# EAGLE board RedBoard_Plus-Panel (EAGLE 9.6.2), part 1 of 6
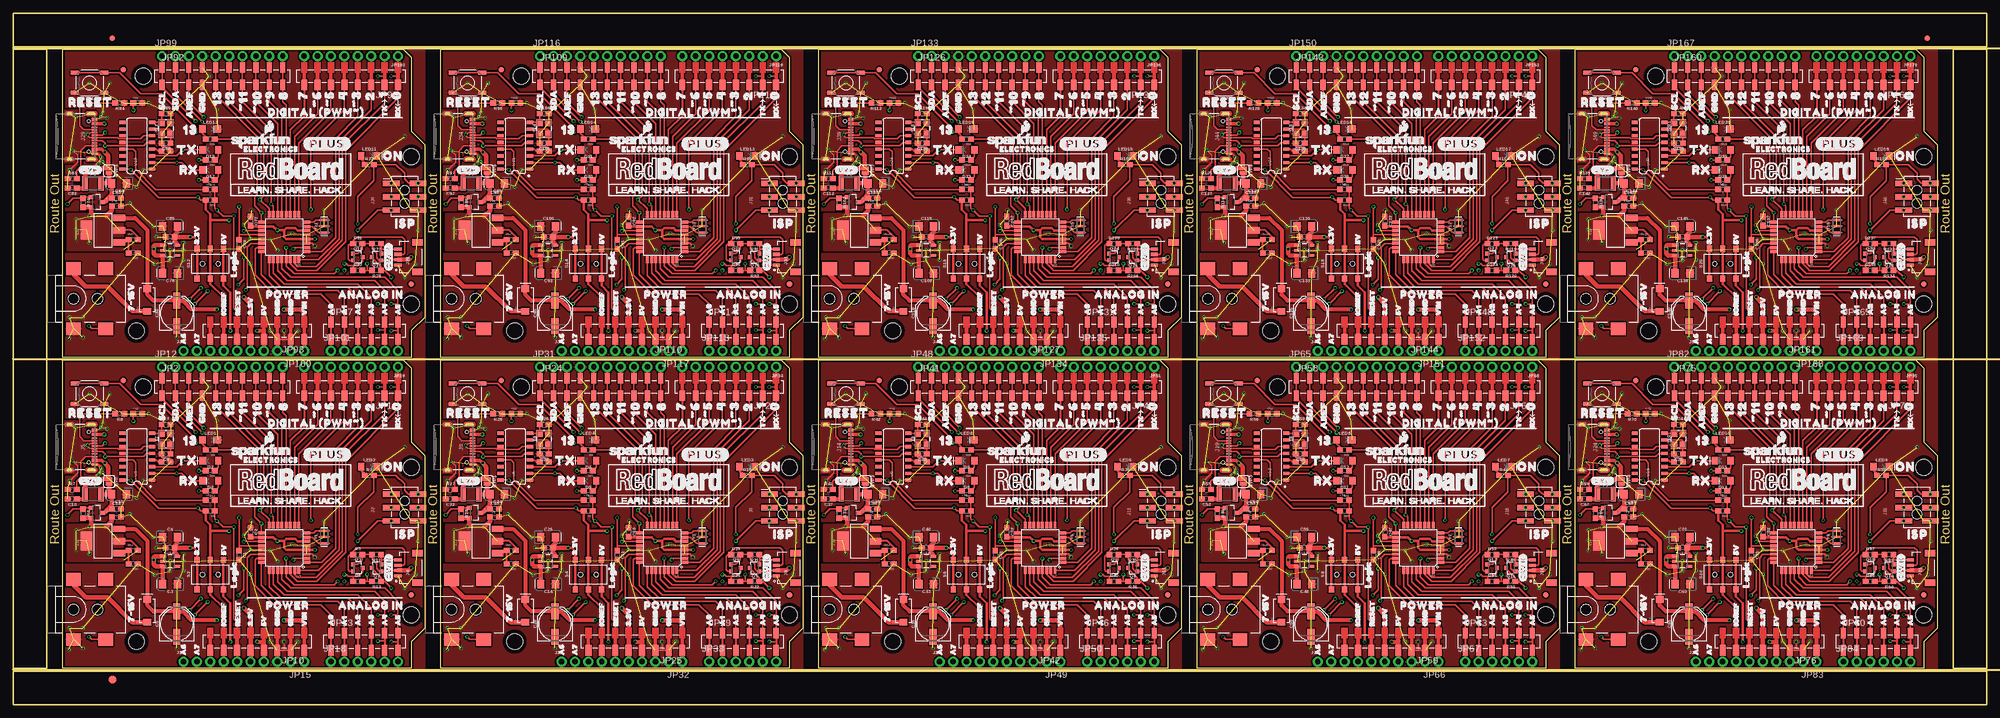
[diagram p0: board, top side]
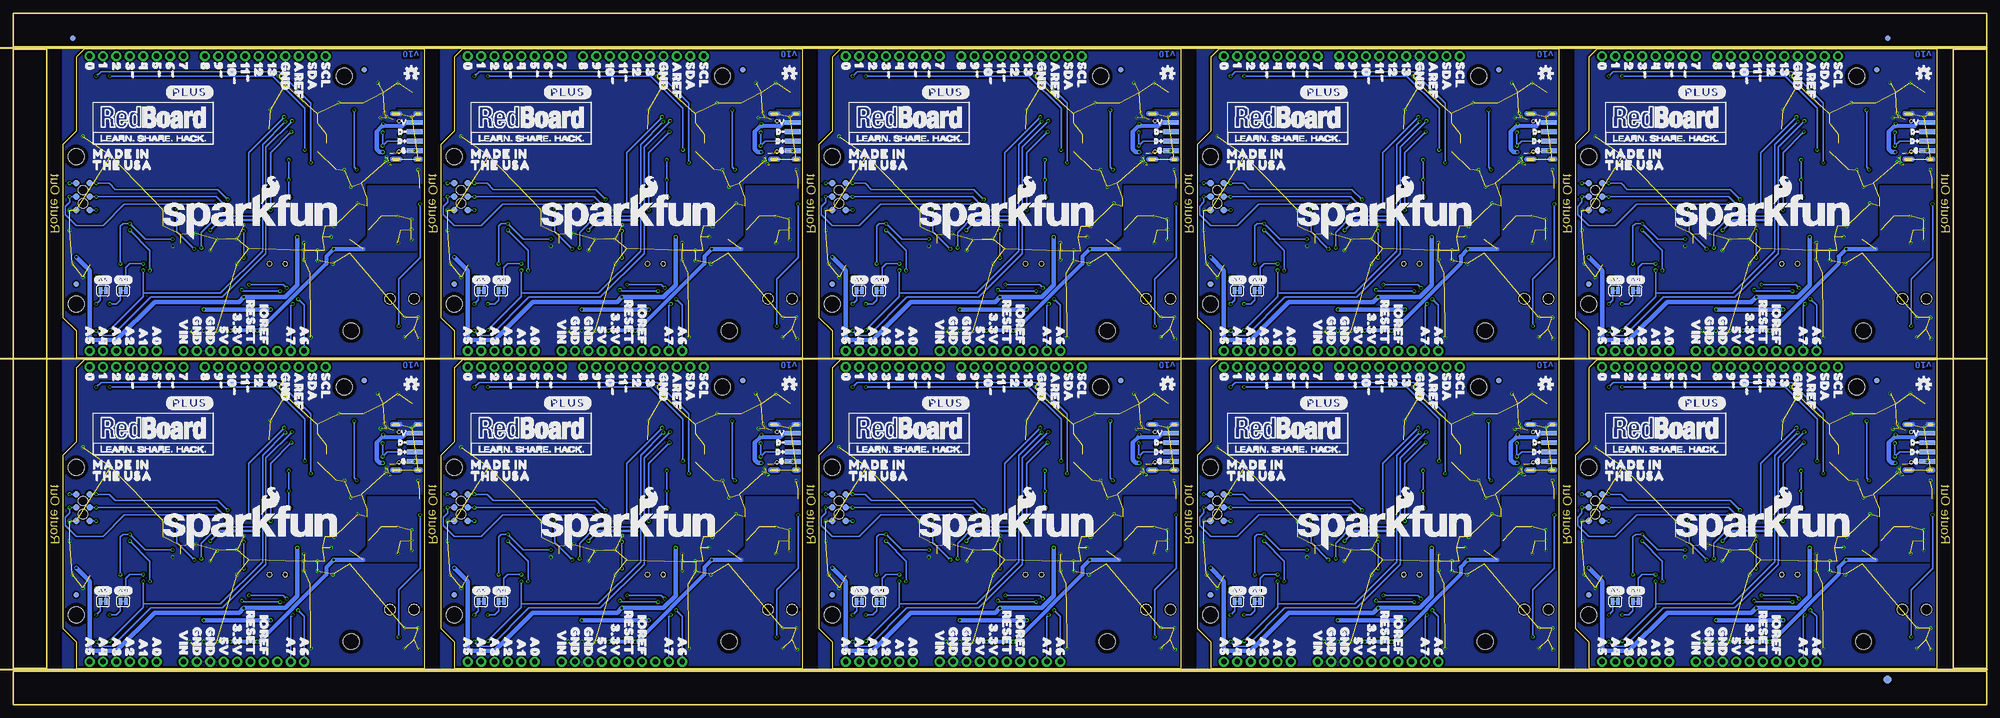
[diagram p1: board, bottom side, seen from below]

Size 373.89 x 131.06 mm. Coordinates in mm from the lower left corner, seen from the top.
Outline: 9.4,65.28 73.91,65.28 75.44,63.75 75.44,49.78 77.98,47.24 77.98,14.48 75.44,11.94 75.44,6.86 9.4,6.86 9.4,65.28
Outline: 81.03,65.28 145.54,65.28 147.07,63.75 147.07,49.78 149.61,47.24 149.61,14.48 147.07,11.94 147.07,6.86 81.03,6.86 81.03,65.28
Outline: 152.65,65.28 217.17,65.28 218.69,63.75 218.69,49.78 221.23,47.24 221.23,14.48 218.69,11.94 218.69,6.86 152.65,6.86 152.65,65.28
Outline: 224.28,65.28 288.8,65.28 290.32,63.75 290.32,49.78 292.86,47.24 292.86,14.48 290.32,11.94 290.32,6.86 224.28,6.86 224.28,65.28
Outline: 295.91,65.28 360.43,65.28 361.95,63.75 361.95,49.78 364.49,47.24 364.49,14.48 361.95,11.94 361.95,6.86 295.91,6.86 295.91,65.28
Outline: 9.4,124.21 73.91,124.21 75.44,122.68 75.44,108.71 77.98,106.17 77.98,73.41 75.44,70.87 75.44,65.79 9.4,65.79 9.4,124.21
Outline: 81.03,124.21 145.54,124.21 147.07,122.68 147.07,108.71 149.61,106.17 149.61,73.41 147.07,70.87 147.07,65.79 81.03,65.79 81.03,124.21
Outline: 152.65,124.21 217.17,124.21 218.69,122.68 218.69,108.71 221.23,106.17 221.23,73.41 218.69,70.87 218.69,65.79 152.65,65.79 152.65,124.21
Outline: 224.28,124.21 288.8,124.21 290.32,122.68 290.32,108.71 292.86,106.17 292.86,73.41 290.32,70.87 290.32,65.79 224.28,65.79 224.28,124.21
Outline: 295.91,124.21 360.43,124.21 361.95,122.68 361.95,108.71 364.49,106.17 364.49,73.41 361.95,70.87 361.95,65.79 295.91,65.79 295.91,124.21
Outline: 0,6.35 373.89,6.35 373.89,0 0,0 0,6.35
Outline: 367.54,124.21 373.89,124.21 373.89,6.86 367.54,6.86 367.54,124.21
Outline: 0,131.06 373.89,131.06 373.89,124.71 0,124.71 0,131.06
Outline: 0,124.21 6.35,124.21 6.35,6.86 0,6.86 0,124.21
Copper layers (1*16): Top 0.035mm / dielectric 1.5mm / Bottom 0.035mm
Design rules "RedBoard_Plus": minimum track width 5mil, minimum drill 0.3mm, track to track 5mil, track to pad 5mil, pad to pad 5mil, via to via 5mil, smd to smd 5mil, copper to edge 7mil, drill to drill 7mil, minimum pad ring 5mil, minimum via ring 5mil, stop-mask expansion 2.5mil, vias tented up to drill 25mil, thermal gap 10mil
Net classes: 0 default: width 0 mm, drill 0 mm; 1 power: width 0.762 mm
vRestrict: area 10,29.2 to 11.4,37.5; area 15.1,30 to 16.8,37.5; area 57.3,17.7 to 57.9,18.2; area 59.8,17.5 to 60.3,18.4; area 20.7,36.2 to 22.1,38.5; area 9.7,19.8 to 18.8,31.9; area 81.7,29.2 to 83.1,37.5; area 86.7,30 to 88.4,37.5; area 128.9,17.7 to 129.5,18.2; area 131.4,17.5 to 132,18.4; area 92.3,36.2 to 93.7,38.5; area 81.3,19.8 to 90.4,31.9; area 153.3,29.2 to 154.7,37.5; area 158.4,30 to 160,37.5; area 200.5,17.7 to 201.2,18.2; area 203.1,17.5 to 203.6,18.4; area 164,36.2 to 165.4,38.5; area 152.9,19.8 to 162.1,31.9; area 224.9,29.2 to 226.3,37.5; area 230,30 to 231.6,37.5; area 272.2,17.7 to 272.8,18.2; area 274.7,17.5 to 275.2,18.4; area 235.6,36.2 to 237,38.5; area 224.5,19.8 to 233.7,31.9; area 296.5,29.2 to 297.9,37.5; area 301.6,30 to 303.3,37.5; area 343.8,17.7 to 344.4,18.2; area 346.3,17.5 to 346.8,18.4; area 307.2,36.2 to 308.6,38.5; area 296.2,19.8 to 305.3,31.9; area 10,88.1 to 11.4,96.4; area 15.1,88.9 to 16.8,96.4; area 57.3,76.6 to 57.9,77.1; area 59.8,76.5 to 60.3,77.3; area 20.7,95.1 to 22.1,97.4; area 9.7,78.7 to 18.8,90.8; area 81.7,88.1 to 83.1,96.4; area 86.7,88.9 to 88.4,96.4; area 128.9,76.6 to 129.5,77.1; area 131.4,76.5 to 132,77.3; area 92.3,95.1 to 93.7,97.4; area 81.3,78.7 to 90.4,90.8; area 153.3,88.1 to 154.7,96.4; area 158.4,88.9 to 160,96.4; area 200.5,76.6 to 201.2,77.1; area 203.1,76.5 to 203.6,77.3; area 164,95.1 to 165.4,97.4; area 152.9,78.7 to 162.1,90.8; area 224.9,88.1 to 226.3,96.4; area 230,88.9 to 231.6,96.4; area 272.2,76.6 to 272.8,77.1; area 274.7,76.5 to 275.2,77.3; area 235.6,95.1 to 237,97.4; area 224.5,78.7 to 233.7,90.8; area 296.5,88.1 to 297.9,96.4; area 301.6,88.9 to 303.3,96.4; area 343.8,76.6 to 344.4,77.1; area 346.3,76.5 to 346.8,77.3; area 307.2,95.1 to 308.6,97.4; area 296.2,78.7 to 305.3,90.8
Milling: 3 lines

## Footprints (pad centres in the part's own frame; a part is rotated, then mirrored left to right if it is on the bottom)
SMT-JUMPER_2_NO_SILK = smd 0.635 x 1.27: 1 -0.406,0; 2 0.406,0
0603 = smd 1.1 x 1: 1 -0.85,0; 2 0.85,0
EIA3216 = smd 1.4 x 1.6: + 1.4,0; - -1.4,0
PANASONIC_D = smd 3 x 1.4: + 2.4,0; - -2.4,0
SMA-DIODE = smd 1.27 x 1.47: A -2.15,0; C 2.15,0
LED-1206 = smd 1.2 x 1.4: A -1.5,0; C 1.5,0
LED-1206-HIDDENSILK = smd 1.2 x 1.4: A -1.5,0; C 1.5,0
FIDUCIAL-1X2 = smd 1 x 1: 1 0,0
FIDUCIAL-1.5X3 = smd 1.5 x 1.5: 1 0,0
1210 = smd 1 x 2.8: 1 -1.5,0; 2 1.5,0
SOT223 = smd 1.219 x 2.235: 1 -2.311,-3.099; 2 0,-3.099; 3 2.311,-3.099 | smd 3.6 x 2.2: 4 0,3.099
1X02_NO_SILK = drill 1.016 pad 1.88: 1 0,0; 2 2.54,0
2X3_SMT_POSTS = smd 1 x 3.17: 1 -2.54,-2.54; 2 -2.54,2.54; 3 0,-2.54; 4 0,2.54; 5 2.54,-2.54; 6 2.54,2.54 | hole 1.8: -1.27,0; 1.27,0
POWER_JACK_SMD = smd 2.8 x 2.4: GND 0,-5.7; P$4 6.1,-5.7; VIN0 0,5.7; VIN1 6.1,5.7 | hole 2.032: 0,0; 4.572,0
JST04_1MM_RA = smd 0.6 x 1.35: 1 -1.5,0; 2 -0.5,0; 3 0.5,0; 4 1.5,0 | smd 1.2 x 2: NC1 2.8,-3.675; NC2 -2.8,-3.675
USB-C-16P-2LAYER-PADS = smd 0.3 x 1: A5 -1.25,-0.34; A6 -0.25,-0.34; A7 0.25,-0.34; A8 1.25,-0.34; B5 1.75,-0.34; B6 0.75,-0.34; B7 -0.75,-0.34; B8 -1.75,-0.34 | smd 0.6 x 1: GND -3.225,-0.34; GND2 3.225,-0.34; VBUS1 -2.45,-0.34; VBUS2 2.45,-0.34 | drill 0.4 pad 0.6 long: SHLD1 -4.318,-0.915; SHLD2 4.318,-0.915; SHLD3 -4.318,-5.095; SHLD4 4.318,-5.095 | hole 0.65: -2.89,-1.445; 2.89,-1.445
1X10_SMD_COMBINED = smd 1 x 2: 1A 0,1.65; 1B 0,-1.65; 2A 2.54,1.65; 2B 2.54,-1.65; 3A 5.08,1.65; 3B 5.08,-1.65; 4A 7.62,1.65; 4B 7.62,-1.65; 5A 10.16,1.65; 5B 10.16,-1.65; 6A 12.7,1.65; 6B 12.7,-1.65; 7A 15.24,1.65; 7B 15.24,-1.65; 8A 17.78,1.65; 8B 17.78,-1.65; 9A 20.32,1.65; 9B 20.32,-1.65; 10A 22.86,1.65; 10B 22.86,-1.65
STAND-OFF-TIGHT = hole 3.048: 0,0
1X08_SMD_COMBINED = smd 1 x 2: 1 0,1.65; 2 2.54,1.65; 3 5.08,1.65; 4 7.62,1.652; 5 10.16,1.65; 6 12.7,1.652; 7 15.24,1.65; 8 17.78,1.652
1X10_NO_SILK = drill 1.016 pad 1.88: 1 0,0; 2 2.54,0; 3 5.08,0; 4 7.62,0; 5 10.16,0; 6 12.7,0; 7 15.24,0; 8 17.78,0; 9 20.32,0; 10 22.86,0
1X06_SMD_STRAIGHT_COMBO = smd 1 x 2: 1 0,-1.65; 1-2 0,1.65; 2 2.54,1.65; 2-2 2.54,-1.65; 3 5.08,-1.65; 3-2 5.08,1.65; 4 7.62,1.65; 4-2 7.62,-1.65; 5 10.16,-1.65; 5-2 10.16,1.65; 6 12.7,1.65; 6-2 12.7,-1.65
USB-SOLDER-PADS = smd 3 x 0.9: D+ 0,-0.889; D- 0,0.889; GND 0,-2.667; VBUS 0,2.667
1X08_NO_SILK = drill 1.016 pad 1.88: 1 0,0; 2 2.54,0; 3 5.08,0; 4 7.62,0; 5 10.16,0; 6 12.7,0; 7 15.24,0; 8 17.78,0
1X06_NO_SILK = drill 1.016 pad 1.88: 1 0,0; 2 2.54,0; 3 5.08,0; 4 7.62,0; 5 10.16,0; 6 12.7,0
SOT23-3 = smd 0.8 x 0.9: 1 -0.95,-1; 2 0.95,-1; 3 0,1.1
SOT323 = smd 0.7 x 0.7: 1 -0.65,-0.925; 2 0.65,-0.925; 3 0,0.925
SMT-JUMPER_2_NC_TRACE_SILK = smd 0.66 x 1.27: 1 -0.521,0; 2 0.521,0
TACTILE_SWITCH_SMD_5.2MM = smd 1.524 x 0.762: 1 -2.794,1.905; 2 2.794,1.905; 3 -2.794,-1.905; 4 2.794,-1.905
SWITCH_DPDT_SMD_AYZ0202 = smd 1 x 1.15: 1 -2.5,2.825; 2 0,2.825; 3 2.5,2.825; 4 -2.5,-2.825; 5 0,-2.825; 6 2.5,-2.825 | hole 0.85: 1.5,0; -1.5,0
PAD.03X.05 = smd 1.27 x 1.27: P$1 0,0
SO016 = smd 0.6 x 1.2: 1 -4.445,-2.8; 2 -3.175,-2.8; 3 -1.905,-2.8; 4 -0.635,-2.8; 5 0.635,-2.8; 6 1.905,-2.8; 7 3.175,-2.8; 8 4.445,-2.8; 9 4.445,2.8; 10 3.175,2.8; 11 1.905,2.8; 12 0.635,2.8; 13 -0.635,2.8; 14 -1.905,2.8; 15 -3.175,2.8; 16 -4.445,2.8
TQFP32-08 = smd 1.27 x 0.559: 1 -4.293,2.8; 2 -4.293,2; 3 -4.293,1.2; 4 -4.293,0.4; 5 -4.293,-0.4; 6 -4.293,-1.2; 7 -4.293,-2; 8 -4.293,-2.8; 17 4.293,-2.8; 18 4.293,-2; 19 4.293,-1.2; 20 4.293,-0.4; 21 4.293,0.4; 22 4.293,1.2; 23 4.293,2; 24 4.293,2.8 | smd 0.559 x 1.27: 9 -2.8,-4.293; 10 -2,-4.293; 11 -1.2,-4.293; 12 -0.4,-4.293; 13 0.4,-4.293; 14 1.2,-4.293; 15 2,-4.293; 16 2.8,-4.293; 25 2.8,4.293; 26 2,4.293; 27 1.2,4.293; 28 0.4,4.293; 29 -0.4,4.293; 30 -1.2,4.293; 31 -2,4.293; 32 -2.8,4.293
SOT23-5 = smd 0.55 x 1.2: 1 -0.95,-1.3; 2 0,-1.3; 3 0.95,-1.3; 4 0.95,1.3; 5 -0.95,1.3
RESONATOR-SMD-3.2X1.3 = smd 0.45 x 1.905: 1 -1.2,0; 2 0,0; 3 1.2,0
CRYSTAL-SMD-3.2X2.5MM = smd 1.4 x 1.2: 1 -1.1,-0.85; 2 1.1,-0.85; 3 1.1,0.85; 4 -1.1,0.85

## Placement (x,y rotation side)
BYP  JUMPER-SMT_2_NO_SILK  [SMT-JUMPER_2_NO_SILK]  18.16,42.29 270 top
BYP1  JUMPER-SMT_2_NO_SILK  [SMT-JUMPER_2_NO_SILK]  89.79,42.29 270 top
BYP2  JUMPER-SMT_2_NO_SILK  [SMT-JUMPER_2_NO_SILK]  161.42,42.29 270 top
BYP3  JUMPER-SMT_2_NO_SILK  [SMT-JUMPER_2_NO_SILK]  233.04,42.29 270 top
BYP4  JUMPER-SMT_2_NO_SILK  [SMT-JUMPER_2_NO_SILK]  304.67,42.29 270 top
BYP5  JUMPER-SMT_2_NO_SILK  [SMT-JUMPER_2_NO_SILK]  18.16,101.22 270 top
BYP6  JUMPER-SMT_2_NO_SILK  [SMT-JUMPER_2_NO_SILK]  89.79,101.22 270 top
BYP7  JUMPER-SMT_2_NO_SILK  [SMT-JUMPER_2_NO_SILK]  161.42,101.22 270 top
BYP8  JUMPER-SMT_2_NO_SILK  [SMT-JUMPER_2_NO_SILK]  233.04,101.22 270 top
BYP9  JUMPER-SMT_2_NO_SILK  [SMT-JUMPER_2_NO_SILK]  304.67,101.22 270 top
C1  0.1uF  [0603]  42.8,28.32 270 top
C2  0.1uF  [0603]  44.96,32.7 270 top
C3  10uF  [EIA3216]  29.72,22.86 180 top
C4  0.1uF  [0603]  19.56,35.56 0 top
C5  47uF  [PANASONIC_D]  30.99,15.24 90 top
C6  10uF  [EIA3216]  29.72,31.75 0 top
C7  10pF  [0603]  28.96,53.09 0 top
C8  0.1uF  [0603]  37.34,38.73 0 top
C9  10pF  [0603]  28.96,47.5 180 top
C10  0.1uF  [0603]  11.18,38.99 180 top
C11  0.1uF  [0603]  114.43,28.32 270 top
C12  0.1uF  [0603]  19.56,37.08 0 top
C13  0.1uF  [0603]  116.59,32.7 270 top
C14  10uF  [EIA3216]  101.35,22.86 180 top
C15  10uF  [EIA3216]  20.07,39.88 180 top
C16  1.0uF  [0603]  29.72,29.72 180 top
C17  10nF  [0603]  28.96,45.97 0 top
C18  0.1uF  [0603]  23.62,55.12 0 top
C19  0.1uF  [0603]  91.19,35.56 0 top
C20  47uF  [PANASONIC_D]  102.62,15.24 90 top
C21  0.1uF  [0603]  108.97,38.73 0 top
C22  0.1uF  [0603]  82.8,38.99 180 top
C23  0.1uF  [0603]  91.19,37.08 0 top
C24  10uF  [EIA3216]  91.69,39.88 180 top
C25  10uF  [EIA3216]  101.35,31.75 0 top
C26  1.0uF  [0603]  101.35,29.72 180 top
C27  10nF  [0603]  100.58,45.97 0 top
C28  0.1uF  [0603]  95.25,55.12 0 top
C29  10pF  [0603]  100.58,53.09 0 top
C30  10pF  [0603]  100.58,47.5 180 top
C31  0.1uF  [0603]  186.06,28.32 270 top
C32  0.1uF  [0603]  188.21,32.7 270 top
C33  10uF  [EIA3216]  172.97,22.86 180 top
C34  0.1uF  [0603]  162.81,35.56 0 top
C35  47uF  [PANASONIC_D]  174.24,15.24 90 top
C36  0.1uF  [0603]  180.59,38.73 0 top
C37  0.1uF  [0603]  154.43,38.99 180 top
C38  0.1uF  [0603]  162.81,37.08 0 top
C39  10uF  [EIA3216]  163.32,39.88 180 top
C40  10uF  [EIA3216]  172.97,31.75 0 top
C41  1.0uF  [0603]  172.97,29.72 180 top
C42  10nF  [0603]  172.21,45.97 0 top
C43  0.1uF  [0603]  166.88,55.12 0 top
C44  10pF  [0603]  172.21,53.09 0 top
C45  10pF  [0603]  172.21,47.5 180 top
C46  0.1uF  [0603]  257.68,28.32 270 top
C47  0.1uF  [0603]  259.84,32.7 270 top
C48  10uF  [EIA3216]  244.6,22.86 180 top
C49  0.1uF  [0603]  234.44,35.56 0 top
C50  47uF  [PANASONIC_D]  245.87,15.24 90 top
C51  0.1uF  [0603]  252.22,38.73 0 top
C52  0.1uF  [0603]  226.06,38.99 180 top
C53  0.1uF  [0603]  234.44,37.08 0 top
C54  10uF  [EIA3216]  234.95,39.88 180 top
C55  10uF  [EIA3216]  244.6,31.75 0 top
C56  1.0uF  [0603]  244.6,29.72 180 top
C57  10nF  [0603]  243.84,45.97 0 top
C58  0.1uF  [0603]  238.51,55.12 0 top
C59  10pF  [0603]  243.84,53.09 0 top
C60  10pF  [0603]  243.84,47.5 180 top
C61  0.1uF  [0603]  329.31,28.32 270 top
C62  0.1uF  [0603]  331.47,32.7 270 top
C63  10uF  [EIA3216]  316.23,22.86 180 top
C64  0.1uF  [0603]  306.07,35.56 0 top
C65  47uF  [PANASONIC_D]  317.5,15.24 90 top
C66  0.1uF  [0603]  323.85,38.73 0 top
C67  0.1uF  [0603]  297.69,38.99 180 top
C68  0.1uF  [0603]  306.07,37.08 0 top
C69  10uF  [EIA3216]  306.58,39.88 180 top
C70  10uF  [EIA3216]  316.23,31.75 0 top
C71  1.0uF  [0603]  316.23,29.72 180 top
C72  10nF  [0603]  315.47,45.97 0 top
C73  0.1uF  [0603]  310.13,55.12 0 top
C74  10pF  [0603]  315.47,53.09 0 top
C75  10pF  [0603]  315.47,47.5 180 top
C76  0.1uF  [0603]  42.8,87.25 270 top
C77  0.1uF  [0603]  44.96,91.62 270 top
C78  10uF  [EIA3216]  29.72,81.79 180 top
C79  0.1uF  [0603]  19.56,94.49 0 top
C80  47uF  [PANASONIC_D]  30.99,74.17 90 top
C81  0.1uF  [0603]  37.34,97.66 0 top
C82  0.1uF  [0603]  11.18,97.92 180 top
C83  0.1uF  [0603]  19.56,96.01 0 top
C84  10uF  [EIA3216]  20.07,98.81 180 top
C85  10uF  [EIA3216]  29.72,90.68 0 top
C86  1.0uF  [0603]  29.72,88.65 180 top
C87  10nF  [0603]  28.96,104.9 0 top
C88  0.1uF  [0603]  23.62,114.05 0 top
C89  10pF  [0603]  28.96,112.01 0 top
C90  10pF  [0603]  28.96,106.43 180 top
C91  0.1uF  [0603]  114.43,87.25 270 top
C92  0.1uF  [0603]  116.59,91.62 270 top
C93  10uF  [EIA3216]  101.35,81.79 180 top
C94  0.1uF  [0603]  91.19,94.49 0 top
C95  47uF  [PANASONIC_D]  102.62,74.17 90 top
C96  0.1uF  [0603]  108.97,97.66 0 top
C97  0.1uF  [0603]  82.8,97.92 180 top
C98  0.1uF  [0603]  91.19,96.01 0 top
C99  10uF  [EIA3216]  91.69,98.81 180 top
C100  10uF  [EIA3216]  101.35,90.68 0 top
C101  1.0uF  [0603]  101.35,88.65 180 top
C102  10nF  [0603]  100.58,104.9 0 top
C103  0.1uF  [0603]  95.25,114.05 0 top
C104  10pF  [0603]  100.58,112.01 0 top
C105  10pF  [0603]  100.58,106.43 180 top
C106  0.1uF  [0603]  186.06,87.25 270 top
C107  0.1uF  [0603]  188.21,91.62 270 top
C108  10uF  [EIA3216]  172.97,81.79 180 top
C109  0.1uF  [0603]  162.81,94.49 0 top
C110  47uF  [PANASONIC_D]  174.24,74.17 90 top
C111  0.1uF  [0603]  180.59,97.66 0 top
C112  0.1uF  [0603]  154.43,97.92 180 top
C113  0.1uF  [0603]  162.81,96.01 0 top
C114  10uF  [EIA3216]  163.32,98.81 180 top
C115  10uF  [EIA3216]  172.97,90.68 0 top
C116  1.0uF  [0603]  172.97,88.65 180 top
C117  10nF  [0603]  172.21,104.9 0 top
C118  0.1uF  [0603]  166.88,114.05 0 top
C119  10pF  [0603]  172.21,112.01 0 top
C120  10pF  [0603]  172.21,106.43 180 top
C121  0.1uF  [0603]  257.68,87.25 270 top
C122  0.1uF  [0603]  259.84,91.62 270 top
C123  10uF  [EIA3216]  244.6,81.79 180 top
C124  0.1uF  [0603]  234.44,94.49 0 top
C125  47uF  [PANASONIC_D]  245.87,74.17 90 top
C126  0.1uF  [0603]  252.22,97.66 0 top
C127  0.1uF  [0603]  226.06,97.92 180 top
C128  0.1uF  [0603]  234.44,96.01 0 top
C129  10uF  [EIA3216]  234.95,98.81 180 top
C130  10uF  [EIA3216]  244.6,90.68 0 top
C131  1.0uF  [0603]  244.6,88.65 180 top
C132  10nF  [0603]  243.84,104.9 0 top
C133  0.1uF  [0603]  238.51,114.05 0 top
C134  10pF  [0603]  243.84,112.01 0 top
C135  10pF  [0603]  243.84,106.43 180 top
C136  0.1uF  [0603]  329.31,87.25 270 top
C137  0.1uF  [0603]  331.47,91.62 270 top
C138  10uF  [EIA3216]  316.23,81.79 180 top
C139  0.1uF  [0603]  306.07,94.49 0 top
C140  47uF  [PANASONIC_D]  317.5,74.17 90 top
C141  0.1uF  [0603]  323.85,97.66 0 top
C142  0.1uF  [0603]  297.69,97.92 180 top
C143  0.1uF  [0603]  306.07,96.01 0 top
C144  10uF  [EIA3216]  306.58,98.81 180 top
C145  10uF  [EIA3216]  316.23,90.68 0 top
C146  1.0uF  [0603]  316.23,88.65 180 top
C147  10nF  [0603]  315.47,104.9 0 top
C148  0.1uF  [0603]  310.13,114.05 0 top
C149  10pF  [0603]  315.47,112.01 0 top
C150  10pF  [0603]  315.47,106.43 180 top
D1  1A/40V/500mV  [SMA-DIODE]  25.4,17.78 90 top
D2  GREEN  [LED-1206]  37.34,46.23 180 top
D3  YELLOW  [LED-1206-HIDDENSILK]  37.34,42.42 180 top
D4  1A/40V/500mV  [SMA-DIODE]  97.03,17.78 90 top
D5  YELLOW  [LED-1206-HIDDENSILK]  108.97,42.42 180 top
D6  GREEN  [LED-1206]  108.97,46.23 180 top
D7  1A/40V/500mV  [SMA-DIODE]  168.66,17.78 90 top
D8  YELLOW  [LED-1206-HIDDENSILK]  180.59,42.42 180 top
D9  GREEN  [LED-1206]  180.59,46.23 180 top
D10  1A/40V/500mV  [SMA-DIODE]  240.28,17.78 90 top
D11  YELLOW  [LED-1206-HIDDENSILK]  252.22,42.42 180 top
D12  GREEN  [LED-1206]  252.22,46.23 180 top
D13  1A/40V/500mV  [SMA-DIODE]  311.91,17.78 90 top
D14  YELLOW  [LED-1206-HIDDENSILK]  323.85,42.42 180 top
D15  GREEN  [LED-1206]  323.85,46.23 180 top
D16  1A/40V/500mV  [SMA-DIODE]  25.4,76.71 90 top
D17  YELLOW  [LED-1206-HIDDENSILK]  37.34,101.35 180 top
D18  GREEN  [LED-1206]  37.34,105.16 180 top
D19  1A/40V/500mV  [SMA-DIODE]  97.03,76.71 90 top
D20  YELLOW  [LED-1206-HIDDENSILK]  108.97,101.35 180 top
D21  GREEN  [LED-1206]  108.97,105.16 180 top
D22  1A/40V/500mV  [SMA-DIODE]  168.66,76.71 90 top
D23  YELLOW  [LED-1206-HIDDENSILK]  180.59,101.35 180 top
D24  GREEN  [LED-1206]  180.59,105.16 180 top
D25  1A/40V/500mV  [SMA-DIODE]  240.28,76.71 90 top
D26  YELLOW  [LED-1206-HIDDENSILK]  252.22,101.35 180 top
D27  GREEN  [LED-1206]  252.22,105.16 180 top
D28  1A/40V/500mV  [SMA-DIODE]  311.91,76.71 90 top
D29  YELLOW  [LED-1206-HIDDENSILK]  323.85,101.35 180 top
D30  GREEN  [LED-1206]  323.85,105.16 180 top
E$1  [FIDUCIAL-1X2]  18.8,126.3 0 top
E$2  [FIDUCIAL-1X2]  18.8,126.3 0 bottom
E$3  [FIDUCIAL-1X2]  362.65,126.3 0 top
E$4  [FIDUCIAL-1X2]  362.65,126.3 0 bottom
E$5  [FIDUCIAL-1.5X3]  18.8,4.76 0 top
E$6  [FIDUCIAL-1.5X3]  18.8,4.76 0 bottom
F1  6V/2A  [1210]  86.74,39.88 0 top
F2  6V/2A  [1210]  15.11,39.88 0 top
F3  6V/2A  [1210]  158.37,39.88 0 top
F4  6V/2A  [1210]  230,39.88 0 top
F5  6V/2A  [1210]  301.62,39.88 0 top
F6  6V/2A  [1210]  15.11,98.81 0 top
F7  6V/2A  [1210]  86.74,98.81 0 top
F8  6V/2A  [1210]  158.37,98.81 0 top
F9  6V/2A  [1210]  230,98.81 0 top
F10  6V/2A  [1210]  301.62,98.81 0 top
FD1  FIDUCIAL1X2  [FIDUCIAL-1X2]  20.83,61.47 0 bottom
FD2  FIDUCIAL1X2  [FIDUCIAL-1X2]  75.44,20.83 0 bottom
FD3  FIDUCIAL1X2  [FIDUCIAL-1X2]  92.46,61.47 0 bottom
FD4  FIDUCIAL1X2  [FIDUCIAL-1X2]  147.07,20.83 0 bottom
FD5  FIDUCIAL1X2  [FIDUCIAL-1X2]  164.08,61.47 0 bottom
FD6  FIDUCIAL1X2  [FIDUCIAL-1X2]  218.69,20.83 0 bottom
FD7  FIDUCIAL1X2  [FIDUCIAL-1X2]  235.71,61.47 0 bottom
FD8  FIDUCIAL1X2  [FIDUCIAL-1X2]  290.32,20.83 0 bottom
FD9  FIDUCIAL1X2  [FIDUCIAL-1X2]  307.34,61.47 0 bottom
FD10  FIDUCIAL1X2  [FIDUCIAL-1X2]  361.95,20.83 0 bottom
FD11  FIDUCIAL1X2  [FIDUCIAL-1X2]  20.83,120.4 0 bottom
FD12  FIDUCIAL1X2  [FIDUCIAL-1X2]  75.44,79.76 0 bottom
FD13  FIDUCIAL1X2  [FIDUCIAL-1X2]  92.46,120.4 0 bottom
FD14  FIDUCIAL1X2  [FIDUCIAL-1X2]  147.07,79.76 0 bottom
FD15  FIDUCIAL1X2  [FIDUCIAL-1X2]  164.08,120.4 0 bottom
FD16  FIDUCIAL1X2  [FIDUCIAL-1X2]  218.69,79.76 0 bottom
FD17  FIDUCIAL1X2  [FIDUCIAL-1X2]  235.71,120.4 0 bottom
FD18  FIDUCIAL1X2  [FIDUCIAL-1X2]  290.32,79.76 0 bottom
FD19  FIDUCIAL1X2  [FIDUCIAL-1X2]  307.34,120.4 0 bottom
FD20  FIDUCIAL1X2  [FIDUCIAL-1X2]  361.95,79.76 0 bottom
IC1  LM1117  [SOT223]  88.65,30.99 90 top
IC2  LM1117  [SOT223]  160.27,30.99 90 top
IC3  LM1117  [SOT223]  17.02,30.99 90 top
IC4  LM1117  [SOT223]  231.9,30.99 90 top
IC5  LM1117  [SOT223]  303.53,30.99 90 top
IC6  LM1117  [SOT223]  17.02,89.92 90 top
IC7  LM1117  [SOT223]  88.65,89.92 90 top
IC8  LM1117  [SOT223]  160.27,89.92 90 top
IC9  LM1117  [SOT223]  231.9,89.92 90 top
IC10  LM1117  [SOT223]  303.53,89.92 90 top
J1  DNP  [1X02_NO_SILK]  32.26,8.13 0 top
J2  ISP  [2X3_SMT_POSTS]  74.17,37.34 270 top
J3  5.5x2.1mm Barrel  [POWER_JACK_SMD]  11.43,18.03 0 top
J4  QWIIC_RIGHT_ANGLE  [JST04_1MM_RA]  72.9,25.91 90 top
J5  USB Female Type C Connector  [USB-C-16P-2LAYER-PADS]  15.75,48.77 270 top
J6  ISP  [2X3_SMT_POSTS]  145.8,37.34 270 top
J7  5.5x2.1mm Barrel  [POWER_JACK_SMD]  83.06,18.03 0 top
J8  QWIIC_RIGHT_ANGLE  [JST04_1MM_RA]  144.53,25.91 90 top
J9  USB Female Type C Connector  [USB-C-16P-2LAYER-PADS]  87.38,48.77 270 top
J10  DNP  [1X02_NO_SILK]  103.89,8.13 0 top
J11  ISP  [2X3_SMT_POSTS]  217.42,37.34 270 top
J12  5.5x2.1mm Barrel  [POWER_JACK_SMD]  154.69,18.03 0 top
J13  QWIIC_RIGHT_ANGLE  [JST04_1MM_RA]  216.15,25.91 90 top
J14  USB Female Type C Connector  [USB-C-16P-2LAYER-PADS]  159,48.77 270 top
J15  DNP  [1X02_NO_SILK]  175.51,8.13 0 top
J16  ISP  [2X3_SMT_POSTS]  289.05,37.34 270 top
J17  5.5x2.1mm Barrel  [POWER_JACK_SMD]  226.31,18.03 0 top
J18  QWIIC_RIGHT_ANGLE  [JST04_1MM_RA]  287.78,25.91 90 top
J19  USB Female Type C Connector  [USB-C-16P-2LAYER-PADS]  230.63,48.77 270 top
J20  DNP  [1X02_NO_SILK]  247.14,8.13 0 top
J21  ISP  [2X3_SMT_POSTS]  360.68,37.34 270 top
J22  5.5x2.1mm Barrel  [POWER_JACK_SMD]  297.94,18.03 0 top
J23  QWIIC_RIGHT_ANGLE  [JST04_1MM_RA]  359.41,25.91 90 top
J24  USB Female Type C Connector  [USB-C-16P-2LAYER-PADS]  302.26,48.77 270 top
J25  DNP  [1X02_NO_SILK]  318.77,8.13 0 top
J26  ISP  [2X3_SMT_POSTS]  74.17,96.27 270 top
J27  5.5x2.1mm Barrel  [POWER_JACK_SMD]  11.43,76.96 0 top
J28  QWIIC_RIGHT_ANGLE  [JST04_1MM_RA]  72.9,84.84 90 top
J29  USB Female Type C Connector  [USB-C-16P-2LAYER-PADS]  15.75,107.7 270 top
J30  DNP  [1X02_NO_SILK]  32.26,67.06 0 top
J31  ISP  [2X3_SMT_POSTS]  145.8,96.27 270 top
J32  5.5x2.1mm Barrel  [POWER_JACK_SMD]  83.06,76.96 0 top
J33  QWIIC_RIGHT_ANGLE  [JST04_1MM_RA]  144.53,84.84 90 top
J34  USB Female Type C Connector  [USB-C-16P-2LAYER-PADS]  87.38,107.7 270 top
J35  DNP  [1X02_NO_SILK]  103.89,67.06 0 top
J36  ISP  [2X3_SMT_POSTS]  217.42,96.27 270 top
J37  5.5x2.1mm Barrel  [POWER_JACK_SMD]  154.69,76.96 0 top
J38  QWIIC_RIGHT_ANGLE  [JST04_1MM_RA]  216.15,84.84 90 top
J39  USB Female Type C Connector  [USB-C-16P-2LAYER-PADS]  159,107.7 270 top
J40  DNP  [1X02_NO_SILK]  175.51,67.06 0 top
J41  ISP  [2X3_SMT_POSTS]  289.05,96.27 270 top
J42  5.5x2.1mm Barrel  [POWER_JACK_SMD]  226.31,76.96 0 top
J43  QWIIC_RIGHT_ANGLE  [JST04_1MM_RA]  287.78,84.84 90 top
J44  USB Female Type C Connector  [USB-C-16P-2LAYER-PADS]  230.63,107.7 270 top
J45  DNP  [1X02_NO_SILK]  247.14,67.06 0 top
J46  ISP  [2X3_SMT_POSTS]  360.68,96.27 270 top
J47  5.5x2.1mm Barrel  [POWER_JACK_SMD]  297.94,76.96 0 top
J48  QWIIC_RIGHT_ANGLE  [JST04_1MM_RA]  359.41,84.84 90 top
J49  USB Female Type C Connector  [USB-C-16P-2LAYER-PADS]  302.26,107.7 270 top
J50  DNP  [1X02_NO_SILK]  318.77,67.06 0 top
JP1  SFE_LOGO_NAME.1_INCH  [SFE_LOGO_NAME_.1]  46.86,47.88 0 top
JP2  [1X10_SMD_COMBINED]  28.19,60.2 0 top
JP3  STAND-OFFTIGHT  [STAND-OFF-TIGHT]  23.37,11.94 0 top
JP4  STAND-OFFTIGHT  [STAND-OFF-TIGHT]  75.44,17.02 0 top
JP5  STAND-OFFTIGHT  [STAND-OFF-TIGHT]  75.44,44.96 0 top
JP6  STAND-OFFTIGHT  [STAND-OFF-TIGHT]  24.64,60.2 0 top
JP7  SFE_LOGO_FLAME.1_INCH  [SFE_LOGO_FLAME_.1]  48.51,50.42 0 top
JP8  FIDUCIAL1X2  [FIDUCIAL-1X2]  75.44,20.83 0 top
JP9  FIDUCIAL1X2  [FIDUCIAL-1X2]  20.83,61.47 0 top
JP10  [1X08_SMD_COMBINED]  55.12,11.94 180 top
JP11  JP11  [1X08_SMD_COMBINED]  72.9,60.2 180 top
JP12  DNP  [1X10_NO_SILK]  28.19,64.01 0 top
JP13  [1X06_SMD_STRAIGHT_COMBO]  60.2,11.94 0 top
JP14  USB_SOLDER_PADS  [USB-SOLDER-PADS]  11.3,48.77 0 bottom
JP15  DNP  [1X08_NO_SILK]  55.12,8.13 180 top
JP16  STAND-OFFTIGHT  [STAND-OFF-TIGHT]  95,11.94 0 top
JP17  STAND-OFFTIGHT  [STAND-OFF-TIGHT]  147.07,17.02 0 top
JP18  DNP  [1X06_NO_SILK]  60.2,8.13 0 top
JP19  DNP  [1X08_NO_SILK]  72.9,64.01 180 top
JP20  STAND-OFFTIGHT  [STAND-OFF-TIGHT]  147.07,44.96 0 top
JP21  STAND-OFFTIGHT  [STAND-OFF-TIGHT]  96.27,60.2 0 top
JP22  FIDUCIAL1X2  [FIDUCIAL-1X2]  147.07,20.83 0 top
JP23  FIDUCIAL1X2  [FIDUCIAL-1X2]  92.46,61.47 0 top
JP24  [1X10_SMD_COMBINED]  99.82,60.2 0 top
JP25  [1X08_SMD_COMBINED]  126.75,11.94 180 top
JP26  SFE_LOGO_NAME.1_INCH  [SFE_LOGO_NAME_.1]  118.49,47.88 0 top
JP27  SFE_LOGO_FLAME.1_INCH  [SFE_LOGO_FLAME_.1]  120.14,50.42 0 top
JP28  JP11  [1X08_SMD_COMBINED]  144.53,60.2 180 top
JP29  [1X06_SMD_STRAIGHT_COMBO]  131.83,11.94 0 top
JP30  USB_SOLDER_PADS  [USB-SOLDER-PADS]  82.93,48.77 0 bottom
JP31  DNP  [1X10_NO_SILK]  99.82,64.01 0 top
JP32  DNP  [1X08_NO_SILK]  126.75,8.13 180 top
JP33  DNP  [1X06_NO_SILK]  131.83,8.13 0 top
JP34  DNP  [1X08_NO_SILK]  144.53,64.01 180 top
JP35  STAND-OFFTIGHT  [STAND-OFF-TIGHT]  166.62,11.94 0 top
JP36  STAND-OFFTIGHT  [STAND-OFF-TIGHT]  218.69,17.02 0 top
JP37  STAND-OFFTIGHT  [STAND-OFF-TIGHT]  218.69,44.96 0 top
JP38  STAND-OFFTIGHT  [STAND-OFF-TIGHT]  167.89,60.2 0 top
JP39  FIDUCIAL1X2  [FIDUCIAL-1X2]  218.69,20.83 0 top
JP40  FIDUCIAL1X2  [FIDUCIAL-1X2]  164.08,61.47 0 top
JP41  [1X10_SMD_COMBINED]  171.45,60.2 0 top
JP42  [1X08_SMD_COMBINED]  198.37,11.94 180 top
JP43  SFE_LOGO_NAME.1_INCH  [SFE_LOGO_NAME_.1]  190.12,47.88 0 top
JP44  SFE_LOGO_FLAME.1_INCH  [SFE_LOGO_FLAME_.1]  191.77,50.42 0 top
JP45  JP11  [1X08_SMD_COMBINED]  216.15,60.2 180 top
JP46  [1X06_SMD_STRAIGHT_COMBO]  203.45,11.94 0 top
JP47  USB_SOLDER_PADS  [USB-SOLDER-PADS]  154.56,48.77 0 bottom
JP48  DNP  [1X10_NO_SILK]  171.45,64.01 0 top
JP49  DNP  [1X08_NO_SILK]  198.37,8.13 180 top
JP50  DNP  [1X06_NO_SILK]  203.45,8.13 0 top
JP51  DNP  [1X08_NO_SILK]  216.15,64.01 180 top
JP52  STAND-OFFTIGHT  [STAND-OFF-TIGHT]  238.25,11.94 0 top
JP53  STAND-OFFTIGHT  [STAND-OFF-TIGHT]  290.32,17.02 0 top
JP54  STAND-OFFTIGHT  [STAND-OFF-TIGHT]  290.32,44.96 0 top
JP55  STAND-OFFTIGHT  [STAND-OFF-TIGHT]  239.52,60.2 0 top
JP56  FIDUCIAL1X2  [FIDUCIAL-1X2]  290.32,20.83 0 top
JP57  FIDUCIAL1X2  [FIDUCIAL-1X2]  235.71,61.47 0 top
JP58  [1X10_SMD_COMBINED]  243.08,60.2 0 top
JP59  [1X08_SMD_COMBINED]  270,11.94 180 top
JP60  SFE_LOGO_NAME.1_INCH  [SFE_LOGO_NAME_.1]  261.75,47.88 0 top
JP61  SFE_LOGO_FLAME.1_INCH  [SFE_LOGO_FLAME_.1]  263.4,50.42 0 top
JP62  JP11  [1X08_SMD_COMBINED]  287.78,60.2 180 top
JP63  [1X06_SMD_STRAIGHT_COMBO]  275.08,11.94 0 top
JP64  USB_SOLDER_PADS  [USB-SOLDER-PADS]  226.19,48.77 0 bottom
JP65  DNP  [1X10_NO_SILK]  243.08,64.01 0 top
JP66  DNP  [1X08_NO_SILK]  270,8.13 180 top
JP67  DNP  [1X06_NO_SILK]  275.08,8.13 0 top
JP68  DNP  [1X08_NO_SILK]  287.78,64.01 180 top
JP69  STAND-OFFTIGHT  [STAND-OFF-TIGHT]  309.88,11.94 0 top
JP70  STAND-OFFTIGHT  [STAND-OFF-TIGHT]  361.95,17.02 0 top
JP71  STAND-OFFTIGHT  [STAND-OFF-TIGHT]  361.95,44.96 0 top
JP72  STAND-OFFTIGHT  [STAND-OFF-TIGHT]  311.15,60.2 0 top
JP73  FIDUCIAL1X2  [FIDUCIAL-1X2]  361.95,20.83 0 top
JP74  FIDUCIAL1X2  [FIDUCIAL-1X2]  307.34,61.47 0 top
JP75  [1X10_SMD_COMBINED]  314.71,60.2 0 top
JP76  [1X08_SMD_COMBINED]  341.63,11.94 180 top
JP77  SFE_LOGO_NAME.1_INCH  [SFE_LOGO_NAME_.1]  333.38,47.88 0 top
JP78  SFE_LOGO_FLAME.1_INCH  [SFE_LOGO_FLAME_.1]  335.03,50.42 0 top
JP79  JP11  [1X08_SMD_COMBINED]  359.41,60.2 180 top
JP80  [1X06_SMD_STRAIGHT_COMBO]  346.71,11.94 0 top
JP81  USB_SOLDER_PADS  [USB-SOLDER-PADS]  297.81,48.77 0 bottom
JP82  DNP  [1X10_NO_SILK]  314.71,64.01 0 top
JP83  DNP  [1X08_NO_SILK]  341.63,8.13 180 top
JP84  DNP  [1X06_NO_SILK]  346.71,8.13 0 top
JP85  DNP  [1X08_NO_SILK]  359.41,64.01 180 top
JP86  STAND-OFFTIGHT  [STAND-OFF-TIGHT]  23.37,70.87 0 top
JP87  STAND-OFFTIGHT  [STAND-OFF-TIGHT]  75.44,75.95 0 top
JP88  STAND-OFFTIGHT  [STAND-OFF-TIGHT]  75.44,103.89 0 top
JP89  STAND-OFFTIGHT  [STAND-OFF-TIGHT]  24.64,119.13 0 top
JP90  FIDUCIAL1X2  [FIDUCIAL-1X2]  75.44,79.76 0 top
JP91  FIDUCIAL1X2  [FIDUCIAL-1X2]  20.83,120.4 0 top
JP92  [1X10_SMD_COMBINED]  28.19,119.13 0 top
JP93  [1X08_SMD_COMBINED]  55.12,70.87 180 top
JP94  SFE_LOGO_NAME.1_INCH  [SFE_LOGO_NAME_.1]  46.86,106.81 0 top
JP95  SFE_LOGO_FLAME.1_INCH  [SFE_LOGO_FLAME_.1]  48.51,109.35 0 top
JP96  JP11  [1X08_SMD_COMBINED]  72.9,119.13 180 top
JP97  [1X06_SMD_STRAIGHT_COMBO]  60.2,70.87 0 top
JP98  USB_SOLDER_PADS  [USB-SOLDER-PADS]  11.3,107.7 0 bottom
JP99  DNP  [1X10_NO_SILK]  28.19,122.94 0 top
JP100  DNP  [1X08_NO_SILK]  55.12,67.06 180 top
JP101  DNP  [1X06_NO_SILK]  60.2,67.06 0 top
JP102  DNP  [1X08_NO_SILK]  72.9,122.94 180 top
JP103  STAND-OFFTIGHT  [STAND-OFF-TIGHT]  95,70.87 0 top
JP104  STAND-OFFTIGHT  [STAND-OFF-TIGHT]  147.07,75.95 0 top
JP105  STAND-OFFTIGHT  [STAND-OFF-TIGHT]  147.07,103.89 0 top
JP106  STAND-OFFTIGHT  [STAND-OFF-TIGHT]  96.27,119.13 0 top
JP107  FIDUCIAL1X2  [FIDUCIAL-1X2]  147.07,79.76 0 top
JP108  FIDUCIAL1X2  [FIDUCIAL-1X2]  92.46,120.4 0 top
JP109  [1X10_SMD_COMBINED]  99.82,119.13 0 top
JP110  [1X08_SMD_COMBINED]  126.75,70.87 180 top
JP111  SFE_LOGO_NAME.1_INCH  [SFE_LOGO_NAME_.1]  118.49,106.81 0 top
JP112  SFE_LOGO_FLAME.1_INCH  [SFE_LOGO_FLAME_.1]  120.14,109.35 0 top
JP113  JP11  [1X08_SMD_COMBINED]  144.53,119.13 180 top
JP114  [1X06_SMD_STRAIGHT_COMBO]  131.83,70.87 0 top
JP115  USB_SOLDER_PADS  [USB-SOLDER-PADS]  82.93,107.7 0 bottom
JP116  DNP  [1X10_NO_SILK]  99.82,122.94 0 top
JP117  DNP  [1X08_NO_SILK]  126.75,67.06 180 top
JP118  DNP  [1X06_NO_SILK]  131.83,67.06 0 top
JP119  DNP  [1X08_NO_SILK]  144.53,122.94 180 top
JP120  STAND-OFFTIGHT  [STAND-OFF-TIGHT]  166.62,70.87 0 top
JP121  STAND-OFFTIGHT  [STAND-OFF-TIGHT]  218.69,75.95 0 top
JP122  STAND-OFFTIGHT  [STAND-OFF-TIGHT]  218.69,103.89 0 top
JP123  STAND-OFFTIGHT  [STAND-OFF-TIGHT]  167.89,119.13 0 top
JP124  FIDUCIAL1X2  [FIDUCIAL-1X2]  218.69,79.76 0 top
JP125  FIDUCIAL1X2  [FIDUCIAL-1X2]  164.08,120.4 0 top
JP126  [1X10_SMD_COMBINED]  171.45,119.13 0 top
JP127  [1X08_SMD_COMBINED]  198.37,70.87 180 top
JP128  SFE_LOGO_NAME.1_INCH  [SFE_LOGO_NAME_.1]  190.12,106.81 0 top
JP129  SFE_LOGO_FLAME.1_INCH  [SFE_LOGO_FLAME_.1]  191.77,109.35 0 top
JP130  JP11  [1X08_SMD_COMBINED]  216.15,119.13 180 top
JP131  [1X06_SMD_STRAIGHT_COMBO]  203.45,70.87 0 top
JP132  USB_SOLDER_PADS  [USB-SOLDER-PADS]  154.56,107.7 0 bottom
JP133  DNP  [1X10_NO_SILK]  171.45,122.94 0 top
JP134  DNP  [1X08_NO_SILK]  198.37,67.06 180 top
JP135  DNP  [1X06_NO_SILK]  203.45,67.06 0 top
JP136  DNP  [1X08_NO_SILK]  216.15,122.94 180 top
JP137  STAND-OFFTIGHT  [STAND-OFF-TIGHT]  238.25,70.87 0 top
JP138  STAND-OFFTIGHT  [STAND-OFF-TIGHT]  290.32,75.95 0 top
JP139  STAND-OFFTIGHT  [STAND-OFF-TIGHT]  290.32,103.89 0 top
JP140  STAND-OFFTIGHT  [STAND-OFF-TIGHT]  239.52,119.13 0 top
JP141  FIDUCIAL1X2  [FIDUCIAL-1X2]  290.32,79.76 0 top
JP142  FIDUCIAL1X2  [FIDUCIAL-1X2]  235.71,120.4 0 top
JP143  [1X10_SMD_COMBINED]  243.08,119.13 0 top
JP144  [1X08_SMD_COMBINED]  270,70.87 180 top
JP145  SFE_LOGO_NAME.1_INCH  [SFE_LOGO_NAME_.1]  261.75,106.81 0 top
JP146  SFE_LOGO_FLAME.1_INCH  [SFE_LOGO_FLAME_.1]  263.4,109.35 0 top
JP147  JP11  [1X08_SMD_COMBINED]  287.78,119.13 180 top
JP148  [1X06_SMD_STRAIGHT_COMBO]  275.08,70.87 0 top
JP149  USB_SOLDER_PADS  [USB-SOLDER-PADS]  226.19,107.7 0 bottom
JP150  DNP  [1X10_NO_SILK]  243.08,122.94 0 top
JP151  DNP  [1X08_NO_SILK]  270,67.06 180 top
JP152  DNP  [1X06_NO_SILK]  275.08,67.06 0 top
JP153  DNP  [1X08_NO_SILK]  287.78,122.94 180 top
JP154  STAND-OFFTIGHT  [STAND-OFF-TIGHT]  309.88,70.87 0 top
JP155  STAND-OFFTIGHT  [STAND-OFF-TIGHT]  361.95,75.95 0 top
JP156  STAND-OFFTIGHT  [STAND-OFF-TIGHT]  361.95,103.89 0 top
JP157  STAND-OFFTIGHT  [STAND-OFF-TIGHT]  311.15,119.13 0 top
JP158  FIDUCIAL1X2  [FIDUCIAL-1X2]  361.95,79.76 0 top
JP159  FIDUCIAL1X2  [FIDUCIAL-1X2]  307.34,120.4 0 top
JP160  [1X10_SMD_COMBINED]  314.71,119.13 0 top
JP161  [1X08_SMD_COMBINED]  341.63,70.87 180 top
JP162  SFE_LOGO_NAME.1_INCH  [SFE_LOGO_NAME_.1]  333.38,106.81 0 top
JP163  SFE_LOGO_FLAME.1_INCH  [SFE_LOGO_FLAME_.1]  335.03,109.35 0 top
JP164  JP11  [1X08_SMD_COMBINED]  359.41,119.13 180 top
JP165  [1X06_SMD_STRAIGHT_COMBO]  346.71,70.87 0 top
JP166  USB_SOLDER_PADS  [USB-SOLDER-PADS]  297.81,107.7 0 bottom
JP167  DNP  [1X10_NO_SILK]  314.71,122.94 0 top
JP168  DNP  [1X08_NO_SILK]  341.63,67.06 180 top
JP169  DNP  [1X06_NO_SILK]  346.71,67.06 0 top
JP170  DNP  [1X08_NO_SILK]  359.41,122.94 180 top
LED1  Blue  [LED-1206-HIDDENSILK]  37.34,50.16 0 top
LED2  GREEN  [LED-1206]  67.44,45.08 0 top
LED3  GREEN  [LED-1206]  139.06,45.08 0 top
LED4  Blue  [LED-1206-HIDDENSILK]  108.97,50.16 0 top
LED5  GREEN  [LED-1206]  210.69,45.08 0 top
LED6  Blue  [LED-1206-HIDDENSILK]  180.59,50.16 0 top
LED7  GREEN  [LED-1206]  282.32,45.08 0 top
LED8  Blue  [LED-1206-HIDDENSILK]  252.22,50.16 0 top
LED9  GREEN  [LED-1206]  353.95,45.08 0 top
LED10  Blue  [LED-1206-HIDDENSILK]  323.85,50.16 0 top
LED11  GREEN  [LED-1206]  67.44,104.01 0 top
LED12  Blue  [LED-1206-HIDDENSILK]  37.34,109.09 0 top
LED13  GREEN  [LED-1206]  139.06,104.01 0 top
LED14  Blue  [LED-1206-HIDDENSILK]  108.97,109.09 0 top
LED15  GREEN  [LED-1206]  210.69,104.01 0 top
LED16  Blue  [LED-1206-HIDDENSILK]  180.59,109.09 0 top
LED17  GREEN  [LED-1206]  282.32,104.01 0 top
LED18  Blue  [LED-1206-HIDDENSILK]  252.22,109.09 0 top
LED19  GREEN  [LED-1206]  353.95,104.01 0 top
LED20  Blue  [LED-1206-HIDDENSILK]  323.85,109.09 0 top
LOGO1  QWIIC_LOGO_5MM  [QWIIC_5MM]  71.12,25.91 90 top
LOGO2  QWIIC_LOGO_5MM  [QWIIC_5MM]  142.75,25.91 90 top
LOGO3  QWIIC_LOGO_5MM  [QWIIC_5MM]  214.38,25.91 90 top
LOGO4  QWIIC_LOGO_5MM  [QWIIC_5MM]  286,25.91 90 top
LOGO5  QWIIC_LOGO_5MM  [QWIIC_5MM]  357.63,25.91 90 top
LOGO6  QWIIC_LOGO_5MM  [QWIIC_5MM]  71.12,84.84 90 top
LOGO7  QWIIC_LOGO_5MM  [QWIIC_5MM]  142.75,84.84 90 top
LOGO8  QWIIC_LOGO_5MM  [QWIIC_5MM]  214.38,84.84 90 top
LOGO9  QWIIC_LOGO_5MM  [QWIIC_5MM]  286,84.84 90 top
LOGO10  QWIIC_LOGO_5MM  [QWIIC_5MM]  357.63,84.84 90 top
Q1  20V/4.2A/52mΩ/1.4W  [SOT23-3]  15.75,36.32 270 top
Q2  310mA/60V/1.6Ω  [SOT323]  68.83,25.91 90 top
Q3  310mA/60V/1.6Ω  [SOT323]  65.28,25.91 270 top
Q4  20V/4.2A/52mΩ/1.4W  [SOT23-3]  87.38,36.32 270 top
Q5  310mA/60V/1.6Ω  [SOT323]  140.46,25.91 90 top
Q6  310mA/60V/1.6Ω  [SOT323]  136.91,25.91 270 top
Q7  20V/4.2A/52mΩ/1.4W  [SOT23-3]  159,36.32 270 top
Q8  310mA/60V/1.6Ω  [SOT323]  212.09,25.91 90 top
Q9  310mA/60V/1.6Ω  [SOT323]  208.53,25.91 270 top
Q10  20V/4.2A/52mΩ/1.4W  [SOT23-3]  230.63,36.32 270 top
Q11  310mA/60V/1.6Ω  [SOT323]  283.72,25.91 90 top
Q12  310mA/60V/1.6Ω  [SOT323]  280.16,25.91 270 top
Q13  20V/4.2A/52mΩ/1.4W  [SOT23-3]  302.26,36.32 270 top
Q14  310mA/60V/1.6Ω  [SOT323]  355.35,25.91 90 top
Q15  310mA/60V/1.6Ω  [SOT323]  351.79,25.91 270 top
Q16  20V/4.2A/52mΩ/1.4W  [SOT23-3]  15.75,95.25 270 top
Q17  310mA/60V/1.6Ω  [SOT323]  68.83,84.84 90 top
Q18  310mA/60V/1.6Ω  [SOT323]  65.28,84.84 270 top
Q19  20V/4.2A/52mΩ/1.4W  [SOT23-3]  87.38,95.25 270 top
Q20  310mA/60V/1.6Ω  [SOT323]  140.46,84.84 90 top
Q21  310mA/60V/1.6Ω  [SOT323]  136.91,84.84 270 top
Q22  20V/4.2A/52mΩ/1.4W  [SOT23-3]  159,95.25 270 top
Q23  310mA/60V/1.6Ω  [SOT323]  212.09,84.84 90 top
Q24  310mA/60V/1.6Ω  [SOT323]  208.53,84.84 270 top
Q25  20V/4.2A/52mΩ/1.4W  [SOT23-3]  230.63,95.25 270 top
Q26  310mA/60V/1.6Ω  [SOT323]  283.72,84.84 90 top
Q27  310mA/60V/1.6Ω  [SOT323]  280.16,84.84 270 top
Q28  20V/4.2A/52mΩ/1.4W  [SOT23-3]  302.26,95.25 270 top
Q29  310mA/60V/1.6Ω  [SOT323]  355.35,84.84 90 top
Q30  310mA/60V/1.6Ω  [SOT323]  351.79,84.84 270 top
QW1  JUMPER-SMT_2_NC_TRACE_SILK  [SMT-JUMPER_2_NC_TRACE_SILK]  70.36,19.56 0 bottom
QW2  JUMPER-SMT_2_NC_TRACE_SILK  [SMT-JUMPER_2_NC_TRACE_SILK]  66.55,19.56 0 bottom
QW3  JUMPER-SMT_2_NC_TRACE_SILK  [SMT-JUMPER_2_NC_TRACE_SILK]  138.18,19.56 0 bottom
QW4  JUMPER-SMT_2_NC_TRACE_SILK  [SMT-JUMPER_2_NC_TRACE_SILK]  141.99,19.56 0 bottom
QW5  JUMPER-SMT_2_NC_TRACE_SILK  [SMT-JUMPER_2_NC_TRACE_SILK]  209.8,19.56 0 bottom
QW6  JUMPER-SMT_2_NC_TRACE_SILK  [SMT-JUMPER_2_NC_TRACE_SILK]  213.61,19.56 0 bottom
QW7  JUMPER-SMT_2_NC_TRACE_SILK  [SMT-JUMPER_2_NC_TRACE_SILK]  281.43,19.56 0 bottom
QW8  JUMPER-SMT_2_NC_TRACE_SILK  [SMT-JUMPER_2_NC_TRACE_SILK]  285.24,19.56 0 bottom
QW9  JUMPER-SMT_2_NC_TRACE_SILK  [SMT-JUMPER_2_NC_TRACE_SILK]  353.06,19.56 0 bottom
QW10  JUMPER-SMT_2_NC_TRACE_SILK  [SMT-JUMPER_2_NC_TRACE_SILK]  356.87,19.56 0 bottom
QW11  JUMPER-SMT_2_NC_TRACE_SILK  [SMT-JUMPER_2_NC_TRACE_SILK]  66.55,78.49 0 bottom
QW12  JUMPER-SMT_2_NC_TRACE_SILK  [SMT-JUMPER_2_NC_TRACE_SILK]  70.36,78.49 0 bottom
QW13  JUMPER-SMT_2_NC_TRACE_SILK  [SMT-JUMPER_2_NC_TRACE_SILK]  138.18,78.49 0 bottom
QW14  JUMPER-SMT_2_NC_TRACE_SILK  [SMT-JUMPER_2_NC_TRACE_SILK]  141.99,78.49 0 bottom
QW15  JUMPER-SMT_2_NC_TRACE_SILK  [SMT-JUMPER_2_NC_TRACE_SILK]  209.8,78.49 0 bottom
QW16  JUMPER-SMT_2_NC_TRACE_SILK  [SMT-JUMPER_2_NC_TRACE_SILK]  213.61,78.49 0 bottom
QW17  JUMPER-SMT_2_NC_TRACE_SILK  [SMT-JUMPER_2_NC_TRACE_SILK]  281.43,78.49 0 bottom
QW18  JUMPER-SMT_2_NC_TRACE_SILK  [SMT-JUMPER_2_NC_TRACE_SILK]  285.24,78.49 0 bottom
QW19  JUMPER-SMT_2_NC_TRACE_SILK  [SMT-JUMPER_2_NC_TRACE_SILK]  353.06,78.49 0 bottom
QW20  JUMPER-SMT_2_NC_TRACE_SILK  [SMT-JUMPER_2_NC_TRACE_SILK]  356.87,78.49 0 bottom
R1  4.7k  [0603]  37.34,48.26 180 top
R2  10k  [0603]  67.44,43.43 0 top
R3  10k  [0603]  37.34,36.7 180 top
R4  10k  [0603]  13.21,36.2 270 top
R5  2.2k  [0603]  65.28,28.45 0 top
R6  2.2k  [0603]  65.28,23.37 0 top
R7  5.1k  [0603]  11.18,40.77 0 top
R8  5.1k  [0603]  20.19,55.12 180 top
R9  4.7k  [0603]  108.97,48.26 180 top
R10  10k  [0603]  139.06,43.43 0 top
R11  2.2k  [0603]  68.83,28.45 180 top
R12  4.7k  [0603]  37.34,40.51 180 top
R13  2.2k  [0603]  68.83,23.37 180 top
R14  715  [0603]  22.73,26.67 180 top
R15  240  [0603]  22.73,29.21 0 top
R16  4.7k  [0603]  37.34,44.32 180 top
R17  10k  [0603]  108.97,36.7 180 top
R18  10k  [0603]  84.84,36.2 270 top
R19  715  [0603]  94.36,26.67 180 top
R20  240  [0603]  94.36,29.21 0 top
R21  2.2k  [0603]  140.46,28.45 180 top
R22  2.2k  [0603]  140.46,23.37 180 top
R23  4.7k  [0603]  108.97,40.51 180 top
R24  4.7k  [0603]  108.97,44.32 180 top
R25  2.2k  [0603]  136.91,28.45 0 top
R26  2.2k  [0603]  136.91,23.37 0 top
R27  5.1k  [0603]  82.8,40.77 0 top
R28  5.1k  [0603]  91.82,55.12 180 top
R29  4.7k  [0603]  180.59,48.26 180 top
R30  10k  [0603]  210.69,43.43 0 top
R31  10k  [0603]  180.59,36.7 180 top
R32  10k  [0603]  156.46,36.2 270 top
R33  715  [0603]  165.99,26.67 180 top
R34  240  [0603]  165.99,29.21 0 top
R35  2.2k  [0603]  212.09,28.45 180 top
R36  2.2k  [0603]  212.09,23.37 180 top
R37  4.7k  [0603]  180.59,40.51 180 top
R38  4.7k  [0603]  180.59,44.32 180 top
R39  2.2k  [0603]  208.53,28.45 0 top
R40  2.2k  [0603]  208.53,23.37 0 top
R41  5.1k  [0603]  154.43,40.77 0 top
R42  5.1k  [0603]  163.45,55.12 180 top
R43  4.7k  [0603]  252.22,48.26 180 top
R44  10k  [0603]  282.32,43.43 0 top
R45  10k  [0603]  252.22,36.7 180 top
R46  10k  [0603]  228.09,36.2 270 top
R47  715  [0603]  237.62,26.67 180 top
R48  240  [0603]  237.62,29.21 0 top
R49  2.2k  [0603]  283.72,28.45 180 top
R50  2.2k  [0603]  283.72,23.37 180 top
R51  4.7k  [0603]  252.22,40.51 180 top
R52  4.7k  [0603]  252.22,44.32 180 top
R53  2.2k  [0603]  280.16,28.45 0 top
R54  2.2k  [0603]  280.16,23.37 0 top
R55  5.1k  [0603]  226.06,40.77 0 top
R56  5.1k  [0603]  235.08,55.12 180 top
R57  4.7k  [0603]  323.85,48.26 180 top
R58  10k  [0603]  353.95,43.43 0 top
R59  10k  [0603]  323.85,36.7 180 top
R60  10k  [0603]  299.72,36.2 270 top
R61  715  [0603]  309.25,26.67 180 top
R62  240  [0603]  309.25,29.21 0 top
R63  2.2k  [0603]  355.35,28.45 180 top
R64  2.2k  [0603]  355.35,23.37 180 top
R65  4.7k  [0603]  323.85,40.51 180 top
R66  4.7k  [0603]  323.85,44.32 180 top
R67  2.2k  [0603]  351.79,28.45 0 top
R68  2.2k  [0603]  351.79,23.37 0 top
R69  5.1k  [0603]  297.69,40.77 0 top
R70  5.1k  [0603]  306.71,55.12 180 top
R71  4.7k  [0603]  37.34,107.19 180 top
R72  10k  [0603]  67.44,102.36 0 top
R73  10k  [0603]  37.34,95.63 180 top
R74  10k  [0603]  13.21,95.12 270 top
R75  715  [0603]  22.73,85.6 180 top
R76  240  [0603]  22.73,88.14 0 top
R77  2.2k  [0603]  68.83,87.38 180 top
R78  2.2k  [0603]  68.83,82.3 180 top
R79  4.7k  [0603]  37.34,99.44 180 top
R80  4.7k  [0603]  37.34,103.25 180 top
R81  2.2k  [0603]  65.28,87.38 0 top
R82  2.2k  [0603]  65.28,82.3 0 top
R83  5.1k  [0603]  11.18,99.7 0 top
R84  5.1k  [0603]  20.19,114.05 180 top
R85  4.7k  [0603]  108.97,107.19 180 top
R86  10k  [0603]  139.06,102.36 0 top
R87  10k  [0603]  108.97,95.63 180 top
R88  10k  [0603]  84.84,95.12 270 top
R89  715  [0603]  94.36,85.6 180 top
R90  240  [0603]  94.36,88.14 0 top
R91  2.2k  [0603]  140.46,87.38 180 top
R92  2.2k  [0603]  140.46,82.3 180 top
R93  4.7k  [0603]  108.97,99.44 180 top
R94  4.7k  [0603]  108.97,103.25 180 top
R95  2.2k  [0603]  136.91,87.38 0 top
R96  2.2k  [0603]  136.91,82.3 0 top
R97  5.1k  [0603]  82.8,99.7 0 top
R98  5.1k  [0603]  91.82,114.05 180 top
R99  4.7k  [0603]  180.59,107.19 180 top
R100  10k  [0603]  210.69,102.36 0 top
R101  10k  [0603]  180.59,95.63 180 top
R102  10k  [0603]  156.46,95.12 270 top
R103  715  [0603]  165.99,85.6 180 top
R104  240  [0603]  165.99,88.14 0 top
R105  2.2k  [0603]  212.09,87.38 180 top
R106  2.2k  [0603]  212.09,82.3 180 top
R107  4.7k  [0603]  180.59,99.44 180 top
R108  4.7k  [0603]  180.59,103.25 180 top
R109  2.2k  [0603]  208.53,87.38 0 top
R110  2.2k  [0603]  208.53,82.3 0 top
R111  5.1k  [0603]  154.43,99.7 0 top
R112  5.1k  [0603]  163.45,114.05 180 top
R113  4.7k  [0603]  252.22,107.19 180 top
R114  10k  [0603]  282.32,102.36 0 top
R115  10k  [0603]  252.22,95.63 180 top
R116  10k  [0603]  228.09,95.12 270 top
R117  715  [0603]  237.62,85.6 180 top
R118  240  [0603]  237.62,88.14 0 top
R119  2.2k  [0603]  283.72,87.38 180 top
R120  2.2k  [0603]  283.72,82.3 180 top
R121  4.7k  [0603]  252.22,99.44 180 top
R122  4.7k  [0603]  252.22,103.25 180 top
R123  2.2k  [0603]  280.16,87.38 0 top
R124  2.2k  [0603]  280.16,82.3 0 top
R125  5.1k  [0603]  226.06,99.7 0 top
R126  5.1k  [0603]  235.08,114.05 180 top
R127  4.7k  [0603]  323.85,107.19 180 top
R128  10k  [0603]  353.95,102.36 0 top
R129  10k  [0603]  323.85,95.63 180 top
R130  10k  [0603]  299.72,95.12 270 top
R131  715  [0603]  309.25,85.6 180 top
R132  240  [0603]  309.25,88.14 0 top
R133  2.2k  [0603]  355.35,87.38 180 top
R134  2.2k  [0603]  355.35,82.3 180 top
R135  4.7k  [0603]  323.85,99.44 180 top
R136  4.7k  [0603]  323.85,103.25 180 top
R137  2.2k  [0603]  351.79,87.38 0 top
R138  2.2k  [0603]  351.79,82.3 0 top
R139  5.1k  [0603]  297.69,99.7 0 top
R140  5.1k  [0603]  306.71,114.05 180 top
S1  Tall Switch  [TACTILE_SWITCH_SMD_5.2MM]  14.48,58.93 180 top
S2  [SWITCH_DPDT_SMD_AYZ0202]  37.34,24.64 0 top
S3  Tall Switch  [TACTILE_SWITCH_SMD_5.2MM]  86.11,58.93 180 top
S4  [SWITCH_DPDT_SMD_AYZ0202]  108.97,24.64 0 top
S5  Tall Switch  [TACTILE_SWITCH_SMD_5.2MM]  157.73,58.93 180 top
S6  [SWITCH_DPDT_SMD_AYZ0202]  180.59,24.64 0 top
S7  Tall Switch  [TACTILE_SWITCH_SMD_5.2MM]  229.36,58.93 180 top
S8  [SWITCH_DPDT_SMD_AYZ0202]  252.22,24.64 0 top
S9  Tall Switch  [TACTILE_SWITCH_SMD_5.2MM]  300.99,58.93 180 top
S10  [SWITCH_DPDT_SMD_AYZ0202]  323.85,24.64 0 top
S11  Tall Switch  [TACTILE_SWITCH_SMD_5.2MM]  14.48,117.86 180 top
S12  [SWITCH_DPDT_SMD_AYZ0202]  37.34,83.57 0 top
S13  Tall Switch  [TACTILE_SWITCH_SMD_5.2MM]  86.11,117.86 180 top
S14  [SWITCH_DPDT_SMD_AYZ0202]  108.97,83.57 0 top
S15  Tall Switch  [TACTILE_SWITCH_SMD_5.2MM]  157.73,117.86 180 top
S16  [SWITCH_DPDT_SMD_AYZ0202]  180.59,83.57 0 top
S17  Tall Switch  [TACTILE_SWITCH_SMD_5.2MM]  229.36,117.86 180 top
S18  [SWITCH_DPDT_SMD_AYZ0202]  252.22,83.57 0 top
S19  Tall Switch  [TACTILE_SWITCH_SMD_5.2MM]  300.99,117.86 180 top
S20  [SWITCH_DPDT_SMD_AYZ0202]  323.85,83.57 0 top
TP1  TP-3x5  [PAD.03X.05]  75.44,39.88 0 bottom
TP2  TP-3x5  [PAD.03X.05]  75.44,37.34 0 bottom
TP3  TP-3x5  [PAD.03X.05]  75.44,34.8 0 bottom
TP4  TP-3x5  [PAD.03X.05]  72.9,39.88 0 bottom
TP5  TP-3x5  [PAD.03X.05]  72.9,37.34 0 bottom
TP6  TP-3x5  [PAD.03X.05]  72.9,34.8 0 bottom
TP7  TP-3x5  [PAD.03X.05]  147.07,39.88 0 bottom
TP8  TP-3x5  [PAD.03X.05]  147.07,37.34 0 bottom
TP9  TP-3x5  [PAD.03X.05]  147.07,34.8 0 bottom
TP10  TP-3x5  [PAD.03X.05]  144.53,39.88 0 bottom
TP11  TP-3x5  [PAD.03X.05]  144.53,37.34 0 bottom
TP12  TP-3x5  [PAD.03X.05]  144.53,34.8 0 bottom
TP13  TP-3x5  [PAD.03X.05]  218.69,39.88 0 bottom
TP14  TP-3x5  [PAD.03X.05]  218.69,37.34 0 bottom
TP15  TP-3x5  [PAD.03X.05]  218.69,34.8 0 bottom
TP16  TP-3x5  [PAD.03X.05]  216.15,39.88 0 bottom
TP17  TP-3x5  [PAD.03X.05]  216.15,37.34 0 bottom
TP18  TP-3x5  [PAD.03X.05]  216.15,34.8 0 bottom
TP19  TP-3x5  [PAD.03X.05]  290.32,39.88 0 bottom
TP20  TP-3x5  [PAD.03X.05]  290.32,37.34 0 bottom
TP21  TP-3x5  [PAD.03X.05]  290.32,34.8 0 bottom
TP22  TP-3x5  [PAD.03X.05]  287.78,39.88 0 bottom
TP23  TP-3x5  [PAD.03X.05]  287.78,37.34 0 bottom
TP24  TP-3x5  [PAD.03X.05]  287.78,34.8 0 bottom
TP25  TP-3x5  [PAD.03X.05]  361.95,39.88 0 bottom
TP26  TP-3x5  [PAD.03X.05]  361.95,37.34 0 bottom
TP27  TP-3x5  [PAD.03X.05]  361.95,34.8 0 bottom
TP28  TP-3x5  [PAD.03X.05]  359.41,39.88 0 bottom
TP29  TP-3x5  [PAD.03X.05]  359.41,37.34 0 bottom
TP30  TP-3x5  [PAD.03X.05]  359.41,34.8 0 bottom
TP31  TP-3x5  [PAD.03X.05]  75.44,98.81 0 bottom
TP32  TP-3x5  [PAD.03X.05]  75.44,96.27 0 bottom
TP33  TP-3x5  [PAD.03X.05]  75.44,93.73 0 bottom
TP34  TP-3x5  [PAD.03X.05]  72.9,98.81 0 bottom
TP35  TP-3x5  [PAD.03X.05]  72.9,96.27 0 bottom
TP36  TP-3x5  [PAD.03X.05]  72.9,93.73 0 bottom
TP37  TP-3x5  [PAD.03X.05]  147.07,98.81 0 bottom
TP38  TP-3x5  [PAD.03X.05]  147.07,96.27 0 bottom
TP39  TP-3x5  [PAD.03X.05]  147.07,93.73 0 bottom
TP40  TP-3x5  [PAD.03X.05]  144.53,98.81 0 bottom
TP41  TP-3x5  [PAD.03X.05]  144.53,96.27 0 bottom
TP42  TP-3x5  [PAD.03X.05]  144.53,93.73 0 bottom
TP43  TP-3x5  [PAD.03X.05]  218.69,98.81 0 bottom
TP44  TP-3x5  [PAD.03X.05]  218.69,96.27 0 bottom
TP45  TP-3x5  [PAD.03X.05]  218.69,93.73 0 bottom
TP46  TP-3x5  [PAD.03X.05]  216.15,98.81 0 bottom
TP47  TP-3x5  [PAD.03X.05]  216.15,96.27 0 bottom
TP48  TP-3x5  [PAD.03X.05]  216.15,93.73 0 bottom
TP49  TP-3x5  [PAD.03X.05]  290.32,98.81 0 bottom
TP50  TP-3x5  [PAD.03X.05]  290.32,96.27 0 bottom
TP51  TP-3x5  [PAD.03X.05]  290.32,93.73 0 bottom
TP52  TP-3x5  [PAD.03X.05]  287.78,98.81 0 bottom
TP53  TP-3x5  [PAD.03X.05]  287.78,96.27 0 bottom
TP54  TP-3x5  [PAD.03X.05]  287.78,93.73 0 bottom
TP55  TP-3x5  [PAD.03X.05]  361.95,98.81 0 bottom
TP56  TP-3x5  [PAD.03X.05]  361.95,96.27 0 bottom
TP57  TP-3x5  [PAD.03X.05]  361.95,93.73 0 bottom
TP58  TP-3x5  [PAD.03X.05]  359.41,98.81 0 bottom
TP59  TP-3x5  [PAD.03X.05]  359.41,96.27 0 bottom
TP60  TP-3x5  [PAD.03X.05]  359.41,93.73 0 bottom
U1  CH340G  [SO016]  23.49,46.99 90 top
U2  ATMEGA328P_TQFP  [TQFP32-08]  122.94,29.72 180 top
U3  3.3V  [SOT23-5]  29.72,27.18 270 top
U4  ATMEGA328P_TQFP  [TQFP32-08]  51.31,29.72 180 top
U5  3.3V  [SOT23-5]  101.35,27.18 270 top
U6  CH340G  [SO016]  95.12,46.99 90 top
U7  ATMEGA328P_TQFP  [TQFP32-08]  194.56,29.72 180 top
U8  3.3V  [SOT23-5]  172.97,27.18 270 top
U9  CH340G  [SO016]  166.75,46.99 90 top
U10  ATMEGA328P_TQFP  [TQFP32-08]  266.19,29.72 180 top
U11  3.3V  [SOT23-5]  244.6,27.18 270 top
U12  CH340G  [SO016]  238.38,46.99 90 top
U13  ATMEGA328P_TQFP  [TQFP32-08]  337.82,29.72 180 top
U14  3.3V  [SOT23-5]  316.23,27.18 270 top
U15  CH340G  [SO016]  310.01,46.99 90 top
U16  ATMEGA328P_TQFP  [TQFP32-08]  51.31,88.65 180 top
U17  3.3V  [SOT23-5]  29.72,86.11 270 top
U18  CH340G  [SO016]  23.49,105.92 90 top
U19  ATMEGA328P_TQFP  [TQFP32-08]  122.94,88.65 180 top
U20  3.3V  [SOT23-5]  101.35,86.11 270 top
U21  CH340G  [SO016]  95.12,105.92 90 top
U22  ATMEGA328P_TQFP  [TQFP32-08]  194.56,88.65 180 top
U23  3.3V  [SOT23-5]  172.97,86.11 270 top
U24  CH340G  [SO016]  166.75,105.92 90 top
U25  ATMEGA328P_TQFP  [TQFP32-08]  266.19,88.65 180 top
U26  3.3V  [SOT23-5]  244.6,86.11 270 top
U27  CH340G  [SO016]  238.38,105.92 90 top
U28  ATMEGA328P_TQFP  [TQFP32-08]  337.82,88.65 180 top
U29  3.3V  [SOT23-5]  316.23,86.11 270 top
U30  CH340G  [SO016]  310.01,105.92 90 top
U$1  REDBOARD_LOGO  [REDBOARD_LOGO]  41.15,37.34 0 top
U$2  [_D#0]  15.49,49.66 0 bottom
U$3  REDBOARD_LOGO  [REDBOARD_LOGO]  72.26,47.12 0 bottom
U$4  [V0]  14.61,51.43 0 bottom
U$5  OSHW-LOGOS  [OSHW-LOGO-S]  83.57,60.71 0 bottom
U$6  [#BYP#0]  84.07,42.42 0 top
U$7  [7#15V0]  93.98,14.86 90 top
U$8  [130]  110.24,53.47 90 top
U$9  [10#0]  45.97,64.01 270 bottom
U$10  [G0]  14.61,46.1 0 bottom
U$11  [LOGIC0]  41.78,21.34 90 top
U$12  [D#0]  15.24,47.88 0 bottom
U$13  [_RESET0]  8.64,55.24 0 top
U$14  [#BYP#0]  12.45,42.42 0 top
U$15  [120]  112.65,53.47 90 top
U$16  OSHW-LOGOS  [OSHW-LOGO-S]  11.94,60.71 0 bottom
U$17  [7#15V0]  22.35,14.86 90 top
U$18  [_AREF0]  33.4,51.05 90 top
U$19  [_SCL0]  28.19,52.58 90 top
U$20  [_SDA0]  30.73,52.45 90 top
U$21  [11#0]  43.43,64.01 270 bottom
U$22  [130]  38.61,53.47 90 top
U$23  [120]  41.02,53.47 90 top
U$24  [#110]  43.56,52.32 90 top
U$25  [#100]  46.23,51.94 90 top
U$26  [#90]  48.64,53.21 90 top
U$27  [80]  51.18,54.61 90 top
U$28  [70]  54.86,54.61 90 top
U$29  [#60]  57.53,53.09 90 top
U$30  [#50]  59.94,53.21 90 top
U$31  [40]  62.48,54.61 90 top
U$32  [#30]  65.02,53.09 90 top
U$33  [20]  67.56,54.48 90 top
U$34  [10]  70.1,54.99 90 top
U$35  [00]  72.64,54.61 90 top
U$36  [TX0]  70.36,51.82 90 top
U$37  [RX0]  72.9,51.82 90 top
U$38  [DIGITAL_##PWM####_0]  47.24,53.34 0 top
U$39  [13_0]  30.99,50.04 0 top
U$40  [_TX0]  29.21,46.23 0 top
U$41  [_RX0]  29.72,42.42 0 top
U$42  [_GND0]  35.81,52.07 90 top
U$43  [3#3V0]  34.8,27.69 90 top
U$44  [5V0]  39.88,27.69 90 top
U$45  [ON0]  68.83,45.08 0 top
U$46  [ISP0]  71.12,32.26 0 top
U$47  [POWER0]  46.86,18.8 0 top
U$48  [ANALOG_IN0]  60.58,18.8 0 top
U$49  [IOREF0]  39.88,14.22 90 top
U$50  [RESET0]  42.55,14.22 90 top
U$51  [3#3V0]  44.96,14.22 90 top
U$52  [5V0]  47.5,14.22 90 top
U$53  [GND0]  50.04,14.22 90 top
U$54  [GND0]  52.58,14.22 90 top
U$55  [VIN0]  55.12,14.22 90 top
U$56  [A00]  60.2,14.35 90 top
U$57  [A10]  62.74,14.35 90 top
U$58  [A20]  65.28,14.35 90 top
U$59  [A30]  67.82,14.35 90 top
U$60  [A40]  70.36,14.35 90 top
U$61  [A50]  72.9,14.35 90 top
U$62  [A60]  32.26,8.76 90 top
U$63  [A70]  34.8,8.76 90 top
U$64  [00]  72.9,64.01 270 bottom
U$65  [10]  70.36,64.01 270 bottom
U$66  [20]  67.82,64.01 270 bottom
U$67  [3#0]  65.28,64.01 270 bottom
U$68  [40]  62.74,64.01 270 bottom
U$69  [5#0]  60.2,64.01 270 bottom
U$70  [6#0]  57.66,64.01 270 bottom
U$71  [70]  55.12,64.01 270 bottom
U$72  [80]  51.05,64.01 270 bottom
U$73  [9#0]  48.51,64.01 270 bottom
U$74  [#110]  115.19,52.32 90 top
U$75  [#100]  117.86,51.94 90 top
U$76  [120]  40.89,64.01 270 bottom
U$77  [130]  38.35,64.01 270 bottom
U$78  [SFE_LOGO_NAME_.3]  42.42,33.53 0 bottom
U$79  [AREF0]  33.27,64.01 270 bottom
U$80  [SDA0]  30.73,64.01 270 bottom
U$81  [SCL0]  28.19,64.01 270 bottom
U$82  [MADE_IN0]  73.53,45.47 0 bottom
U$83  [THE_USA0]  73.53,43.31 0 bottom
U$84  [_A40]  70.36,14.48 270 bottom
U$85  [_GND_0]  35.81,64.64 270 bottom
U$86  [_A30]  67.82,14.48 270 bottom
U$87  [_A20]  65.28,14.48 270 bottom
U$88  [_A10]  62.74,14.1 270 bottom
U$89  [_A00]  60.2,14.48 270 bottom
U$90  [_VIN0]  55.12,15.75 270 bottom
U$91  [#90]  120.27,53.21 90 top
U$92  [80]  122.81,54.61 90 top
U$93  [_5V0]  47.5,14.48 270 bottom
U$94  [_3#3V0]  44.96,17.02 270 bottom
U$95  [_RESET0]  42.42,19.56 270 bottom
U$96  [_IOREF0]  39.88,18.67 270 bottom
U$97  [_A60]  32.26,14.48 270 bottom
U$98  [_A70]  34.8,14.48 270 bottom
U$99  [_GND_0]  50.04,16.38 270 bottom
U$100  [#PLUS#0]  54.99,47.37 0 top
U$101  [SFE_LOGO_FLAME_.2]  38.61,38.61 0 bottom
U$102  [_A50]  72.9,14.48 270 bottom
U$103  [#PLUS#0]  58.42,57.15 0 bottom
U$104  [ELECTRONICS0]  42.93,46.35 0 top
U$105  [#A4#0]  68.2,21.59 0 bottom
U$106  [#A5#0]  72.01,21.59 0 bottom
U$107  [_GND_0]  52.58,16.38 270 bottom
U$108  [70]  126.49,54.61 90 top
U$109  [#60]  129.16,53.09 90 top
U$110  [#50]  131.57,53.21 90 top
U$111  [40]  134.11,54.61 90 top
U$112  [#30]  136.65,53.09 90 top
U$113  [20]  139.19,54.48 90 top
U$114  [10]  141.73,54.99 90 top
U$115  [00]  144.27,54.61 90 top
U$116  [TX0]  141.99,51.82 90 top
U$117  [RX0]  144.53,51.82 90 top
U$118  [DIGITAL_##PWM####_0]  118.87,53.34 0 top
U$119  [13_0]  102.62,50.04 0 top
U$120  [_TX0]  100.84,46.23 0 top
U$121  [_RX0]  101.35,42.42 0 top
U$122  [3#3V0]  106.43,27.69 90 top
U$123  [5V0]  111.51,27.69 90 top
U$124  [ON0]  140.46,45.08 0 top
U$125  [ISP0]  142.75,32.26 0 top
U$126  [POWER0]  118.49,18.8 0 top
U$127  [ANALOG_IN0]  132.21,18.8 0 top
U$128  [IOREF0]  111.51,14.22 90 top
U$129  [RESET0]  114.17,14.22 90 top
U$130  [3#3V0]  116.59,14.22 90 top
U$131  [5V0]  119.13,14.22 90 top
U$132  [GND0]  121.67,14.22 90 top
U$133  [GND0]  124.21,14.22 90 top
U$134  [VIN0]  126.75,14.22 90 top
U$135  [A00]  131.83,14.35 90 top
U$136  [A10]  134.37,14.35 90 top
U$137  [A20]  136.91,14.35 90 top
U$138  [A30]  139.45,14.35 90 top
U$139  [A40]  141.99,14.35 90 top
U$140  [A50]  144.53,14.35 90 top
U$141  [A60]  103.89,8.76 90 top
U$142  [A70]  106.43,8.76 90 top
U$143  [00]  144.53,64.01 270 bottom
U$144  [10]  141.99,64.01 270 bottom
U$145  [20]  139.45,64.01 270 bottom
U$146  [3#0]  136.91,64.01 270 bottom
U$147  [40]  134.37,64.01 270 bottom
U$148  [5#0]  131.83,64.01 270 bottom
U$149  [6#0]  129.29,64.01 270 bottom
U$150  [70]  126.75,64.01 270 bottom
U$151  [80]  122.68,64.01 270 bottom
U$152  [9#0]  120.14,64.01 270 bottom
U$153  [120]  112.52,64.01 270 bottom
U$154  [130]  109.98,64.01 270 bottom
U$155  [AREF0]  104.9,64.01 270 bottom
U$156  [SDA0]  102.36,64.01 270 bottom
U$157  [SCL0]  99.82,64.01 270 bottom
U$158  [MADE_IN0]  145.16,45.47 0 bottom
U$159  [THE_USA0]  145.16,43.31 0 bottom
U$160  [V0]  86.23,51.43 0 bottom
U$161  [D#0]  86.87,47.88 0 bottom
U$162  [_D#0]  87.12,49.66 0 bottom
U$163  [G0]  86.23,46.1 0 bottom
U$164  REDBOARD_LOGO  [REDBOARD_LOGO]  112.78,37.34 0 top
U$165  REDBOARD_LOGO  [REDBOARD_LOGO]  143.89,47.12 0 bottom